# EAGLE board keypad (EAGLE 7.3.0)
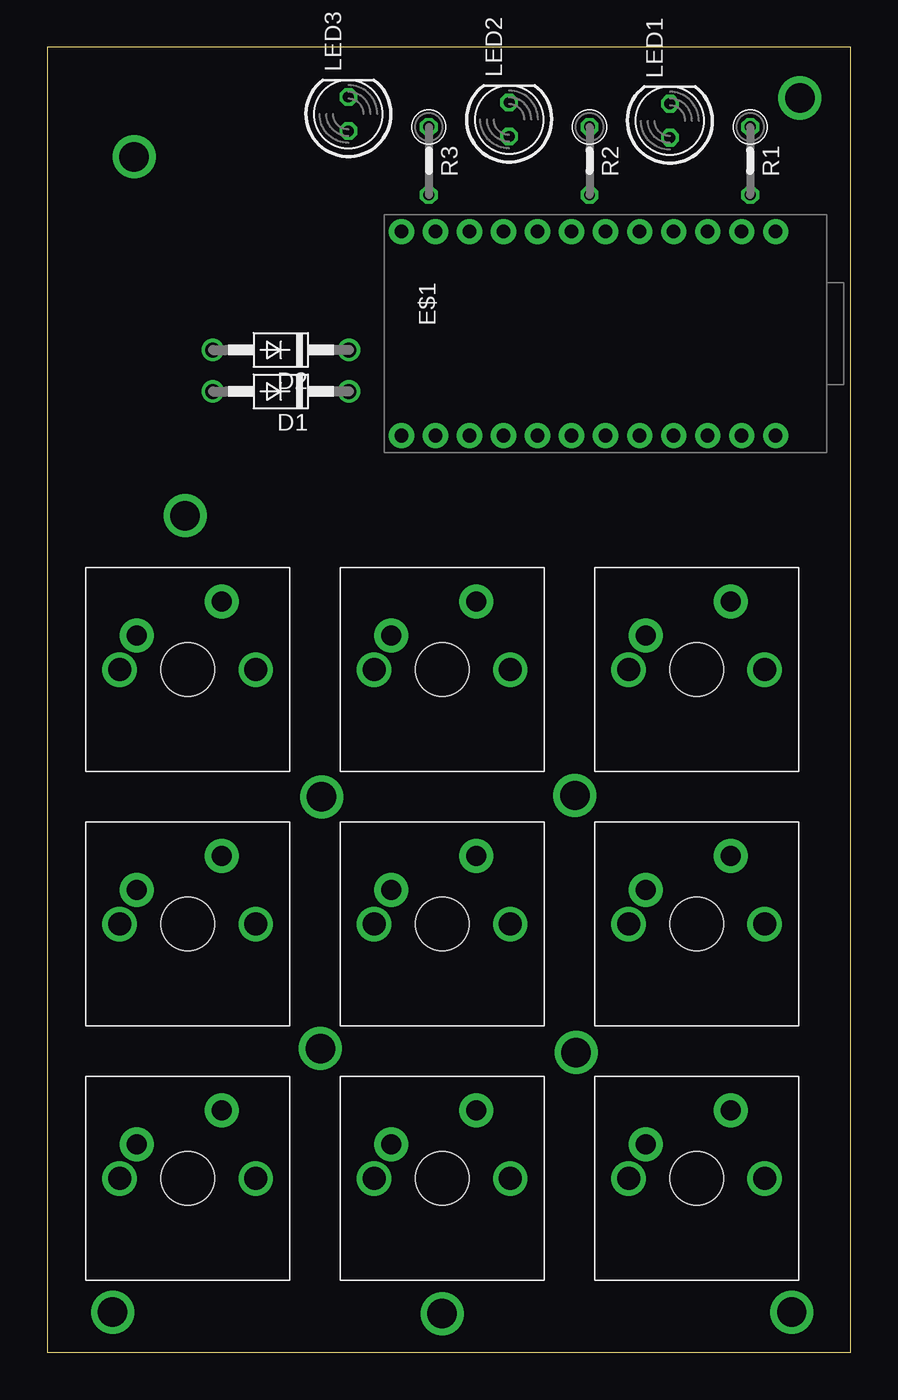
[diagram p0: board, top side]
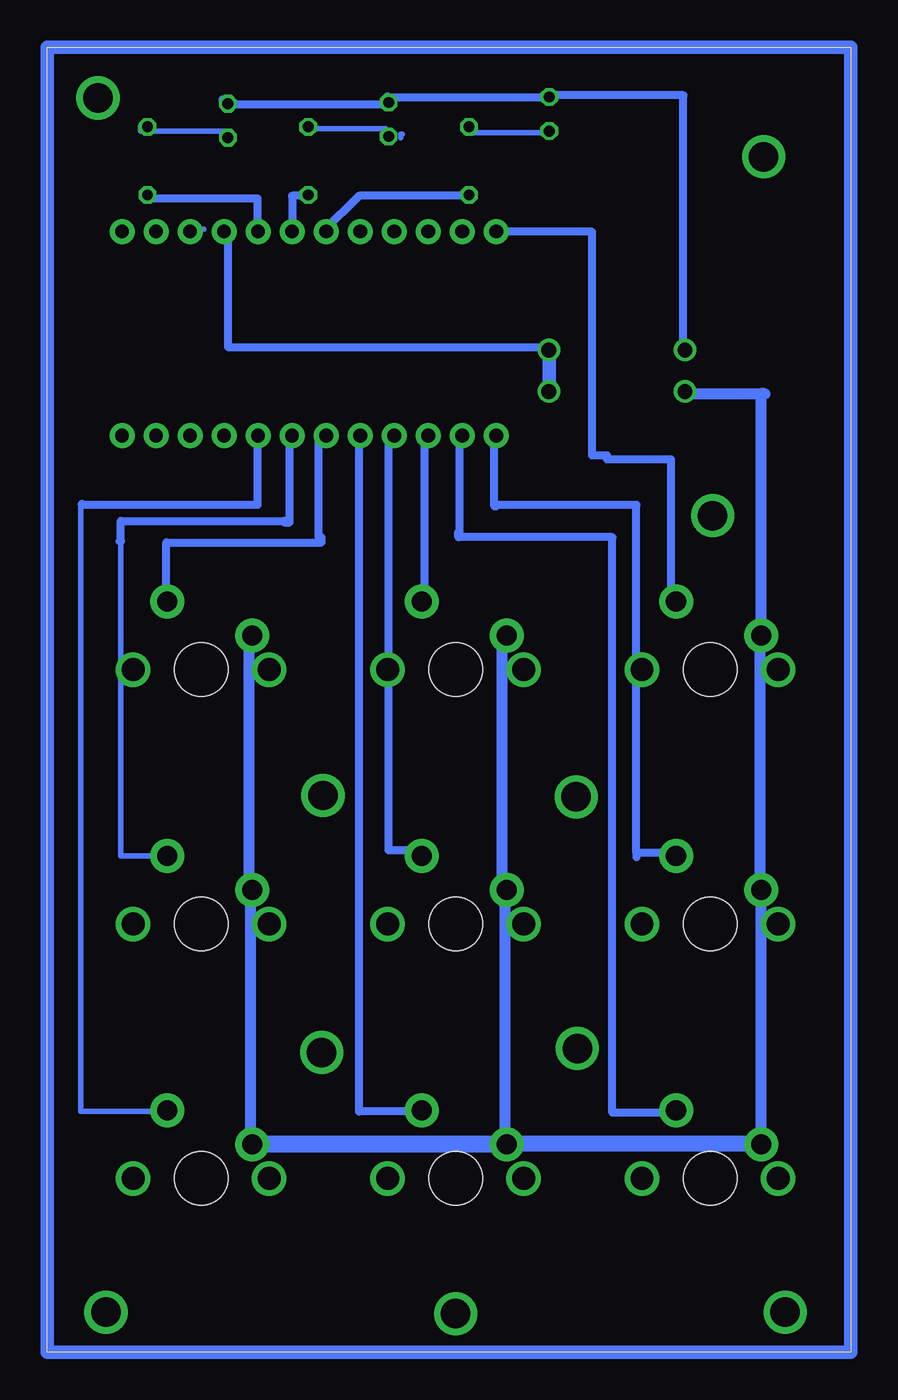
[diagram p1: board, bottom side, seen from below]

Size 60 x 97.5 mm. Coordinates in mm from the lower left corner, seen from the top.
Outline: 0,0 60,0 60,97.5 0,97.5 0,0
Copper layers (1*16): Top 0.035mm / dielectric 1.5mm / Bottom 0.035mm
Design rules "default": minimum track width 10mil, minimum drill 24mil, track to track 8mil, track to pad 8mil, pad to pad 8mil, via to via 8mil, smd to smd 8mil, copper to edge 40mil, drill to drill 8mil, minimum pad ring 10mil, minimum via ring 8mil, stop-mask expansion 4mil, vias tented up to drill 0mil, thermal gap 10mil

## Footprints (pad centres in the part's own frame; a part is rotated, then mirrored left to right if it is on the bottom)
DO41-10 = drill 1.118: A 5.08,0; C -5.08,0
ARDUINO_PRO_MICRO = drill 1.016 pad 1.88: 1 -7.62,12.7; 2 -7.62,10.16; 3 -7.62,7.62; 4 -7.62,5.08; 5 -7.62,2.54; 6 -7.62,0; 7 -7.62,-2.54; 8 -7.62,-5.08; 9 -7.62,-7.62; 10 -7.62,-10.16; 11 -7.62,-12.7; 12 -7.62,-15.24; 13 7.62,-15.24; 14 7.62,-12.7; 15 7.62,-10.16; 16 7.62,-7.62; 17 7.62,-5.08; 18 7.62,-2.54; 19 7.62,0; 20 7.62,2.54; 21 7.62,5.08; 22 7.62,7.62; 23 7.62,10.16; 24 7.62,12.7
LED5MM = drill 0.813 octagon: A -1.27,0; K 1.27,0
0207/5V = drill 0.813 octagon: 1 -2.54,0; 2 2.54,0
CHERRY-MX = drill 1.714 pad 1.93: P$3 -5.08,0; P$4 5.08,0 | drill 1.5 pad 2.54: SW1 -3.81,2.54; SW2 2.54,5.08 | hole 4: 0,0

## Placement (x,y rotation side)
D1  1N4004  [DO41-10]  17.45,71.78 180 top
D2  1N4004  [DO41-10]  17.45,74.88 180 top
E$1  [ARDUINO_PRO_MICRO]  41.7,76.1 270 top
LED1  [LED5MM]  46.5,92 90 top
LED2  [LED5MM]  34.5,92.09 90 top
LED3  [LED5MM]  22.5,92.5 90 top
R1  [0207/5V]  52.5,89 270 top
R2  [0207/5V]  40.5,89 270 top
R3  [0207/5V]  28.5,89 270 top
U$2  CHERRY-MX  [CHERRY-MX]  10.5,51 0 top
U$3  CHERRY-MX  [CHERRY-MX]  10.5,32 0 top
U$4  CHERRY-MX  [CHERRY-MX]  48.5,51 0 top
U$5  CHERRY-MX  [CHERRY-MX]  48.5,13 0 top
U$8  CHERRY-MX  [CHERRY-MX]  10.5,13 0 top
U$9  CHERRY-MX  [CHERRY-MX]  29.5,13 0 top
U$10  CHERRY-MX  [CHERRY-MX]  29.5,32 0 top
U$11  CHERRY-MX  [CHERRY-MX]  29.5,51 0 top
U$13  CHERRY-MX  [CHERRY-MX]  48.5,32 0 top

## Library data of the parts
D1 D2 = diode
E$1 = SparkFun-Boards
LED1-LED3 = led
R1-R3 = resistor
U$2-U$5 U$8-U$11 U$13 = cherrymx

## Nets
N$3: U$3.SW2
N$4: U$8.SW2
N$6: U$10.SW2
N$7: U$9.SW2
N$8: U$4.SW2
N$9: U$13.SW2
N$10: U$5.SW2

## Tracks (layer width: path | path; a pad name or v marks a point on that pad's centre or on a via)
N$3
  Bottom 0.406: 13.04,37.2 U$3.SW2
N$4
  Bottom 0.406: 13.04,18.2 U$8.SW2
N$6
  Bottom 0.406: 32.04,36.8 U$10.SW2
N$7
  Bottom 0.406: 32.04,18.1 U$9.SW2
N$8
  Bottom 0.406: 51.04,56 U$4.SW2
N$9
  Bottom 0.406: 54.5,60.8 54.5,37.1 51.04,37.1 U$13.SW2
N$10
  Bottom 0.406: 53.8,63.4 57.4,63.4 57.5,63.4 57.5,18 51.04,18 U$5.SW2
  Bottom 0.61: 44.4,68.4 44.3,68.4 44.3,63.3 57.4,63.3 57.4,63.4
N$17
  Bottom 0.406: 33.6,90.73 33.6,91 33.5,91
S$1
  Bottom 1.016: 0,97.5 0,0 60,0 60,97.5 0,97.5
S$2
  Bottom 0.61: 13.3,56 13.4,56 13.4,66.7 18.2,66.7 18.2,67 19.3,67 19.3,83.7 26.5,83.7
S$3
  Bottom 0.406: 46.7,93.4 46.7,93.3
S$4
  Bottom 0.406: 22.6,91.1 28.5,91.1 28.5,91.8
S$5
  Bottom 0.406: 34.7,91.4 40.4,91.4 40.4,91.2
S$6
  Bottom 0.406: 46.7,91.2 53,91.2 53,91.6
S$7
  Bottom 0.406: 52.6,86.6 52.6,86.3
S$8
  Bottom 0.406: 48.4,83.9 48.3,83.9
S$9
  Bottom 0.61: 52.4,86.2 44.3,86.2 44.3,83.6
S$10
  Bottom 0.61: 13.3,37.3 16,37.3 | 16,37.3 16,37 | 16,37.3 16,63.3 26.5,63.3 26.5,63.2 26.6,63.2 26.6,68.2
S$11
  Bottom 0.61: 32.5,37.5 34.5,37.5 34.5,68.6
S$12
  Bottom 0.61: 32,56.1 31.8,56.1 31.8,68.6
S$13
  Bottom 0.61: 40.7,86.4 41.7,86.4 41.7,83.5
S$14
  Bottom 0.61: 51.1,56 51.1,60.5 39.5,60.5 39.5,60.9 39.7,60.9 39.7,68.7
S$15
  Bottom 0.61: 28.5,86.4 36.7,86.4 39.4,83.7
S$16  (via drill 2.2 pad 2.54)
  other vias: 4.9,3
S$17  (via drill 2.2 pad 2.54)
  other vias: 55.6,3
S$18  (via drill 2.2 pad 2.54)
  other vias: 29.5,2.9
S$19  (via drill 2.2 pad 2.54)
  other vias: 56.2,93.7
S$20  (via drill 2.2 pad 2.54)
  other vias: 6.5,89.3
S$21
  Bottom 0.61: 46.8,83.3 46.7,83.3
S$22  (via drill 2.2 pad 2.54)
  other vias: 20.4,22.7
S$23  (via drill 2.2 pad 2.54)
  other vias: 20.5,41.5 10.3,62.5 39.4,41.6 39.5,22.4
S$24
  Bottom 0.61: 46.9,93.5 46.9,93.6
S$25
  Bottom 0.61: 34.6,93.8 34.6,93.5
S$26
  Bottom 0.61: 46.8,83.6 46.5,83.6 46.5,75.1 22.6,75.1 22.6,74.6
S$27
  Bottom 0.406: 34.7,93.7 34.7,93.4
S$28
  Bottom 0.61: 13,17.9 17.8,17.9 17.8,60.9 29.3,60.9 29.3,61.3 29.2,61.3 29.2,68.5
S$29
  Bottom 0.61: 54.6,60.6 54.5,60.6 54.5,62.1 42.3,62.1 42.3,62 41.9,62 41.9,68.5
S$30
  Bottom 0.61: 31.9,18 36.7,18 36.7,68.4
S$31
  Bottom 1.016: 22.5,75 22.5,72.5
S$32
  Bottom 0.61: 12.5,74.7 12.5,93.9 22.8,93.9 22.8,93.7 34.6,93.7 34.6,93.2 46.6,93.2 46.6,93.3
S$33
  Bottom 0.813: 12.5,71.6 6.7,71.6 | 6.4,71.6 6.7,71.6 | 6.7,71.6 6.7,53.5 6.8,53.5 6.8,34.1 6.7,34.1 6.7,15.4 25.9,15.4 25.9,15.3 | 25.9,15.3 44.8,15.3 44.8,34.9 44.9,34.9 44.9,53.6 | 25.9,15.3 25.8,15.3 25.8,34.6 26,34.6 26,53.7
S$34  (via drill 2.8)
  other vias: 10.5,51
S$35  (via drill 2.8)
  other vias: 29.5,51
S$36  (via drill 2.8)
  other vias: 48.5,51
S$37  (via drill 2.8)
  other vias: 10.5,31.9
S$38  (via drill 2.8)
  other vias: 29.5,31.9
S$39  (via drill 2.8)
  other vias: 48.5,31.9
S$40  (via drill 2.8)
  other vias: 10.5,13
S$41  (via drill 2.8)
  other vias: 29.5,13
S$42  (via drill 2.8)
  other vias: 48.5,13
S$43
  Bottom 1.016: 6.8,15.7 44.9,15.7 44.9,16